# EAGLE board 13506-Spectacle_Audio_Output_Board-panel.10 (EAGLE 7.5.0), part 1 of 7
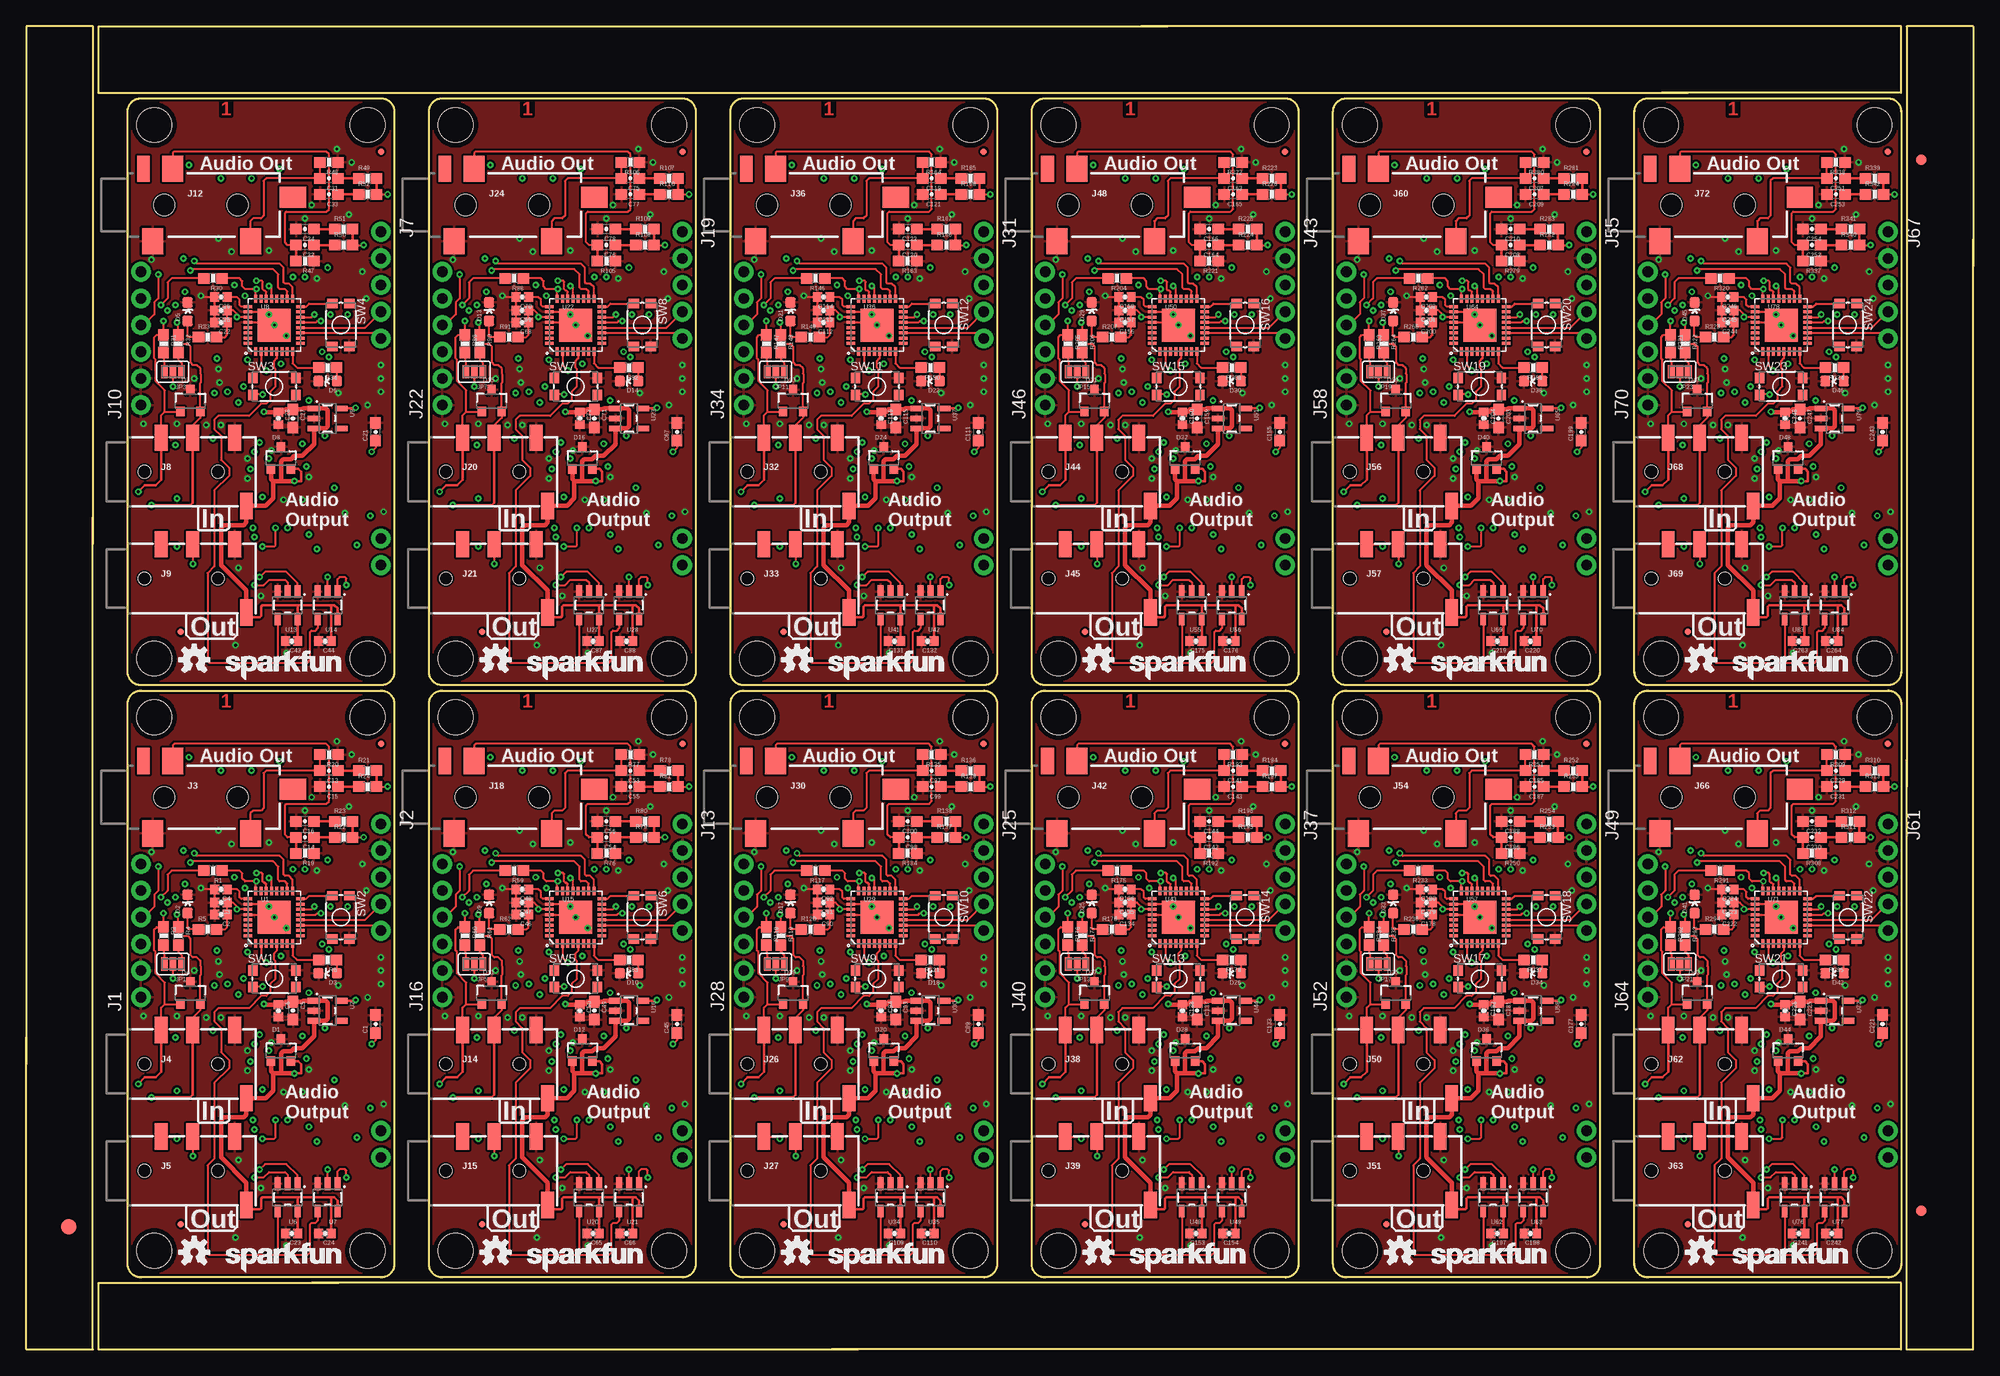
[diagram p0: board, top side]
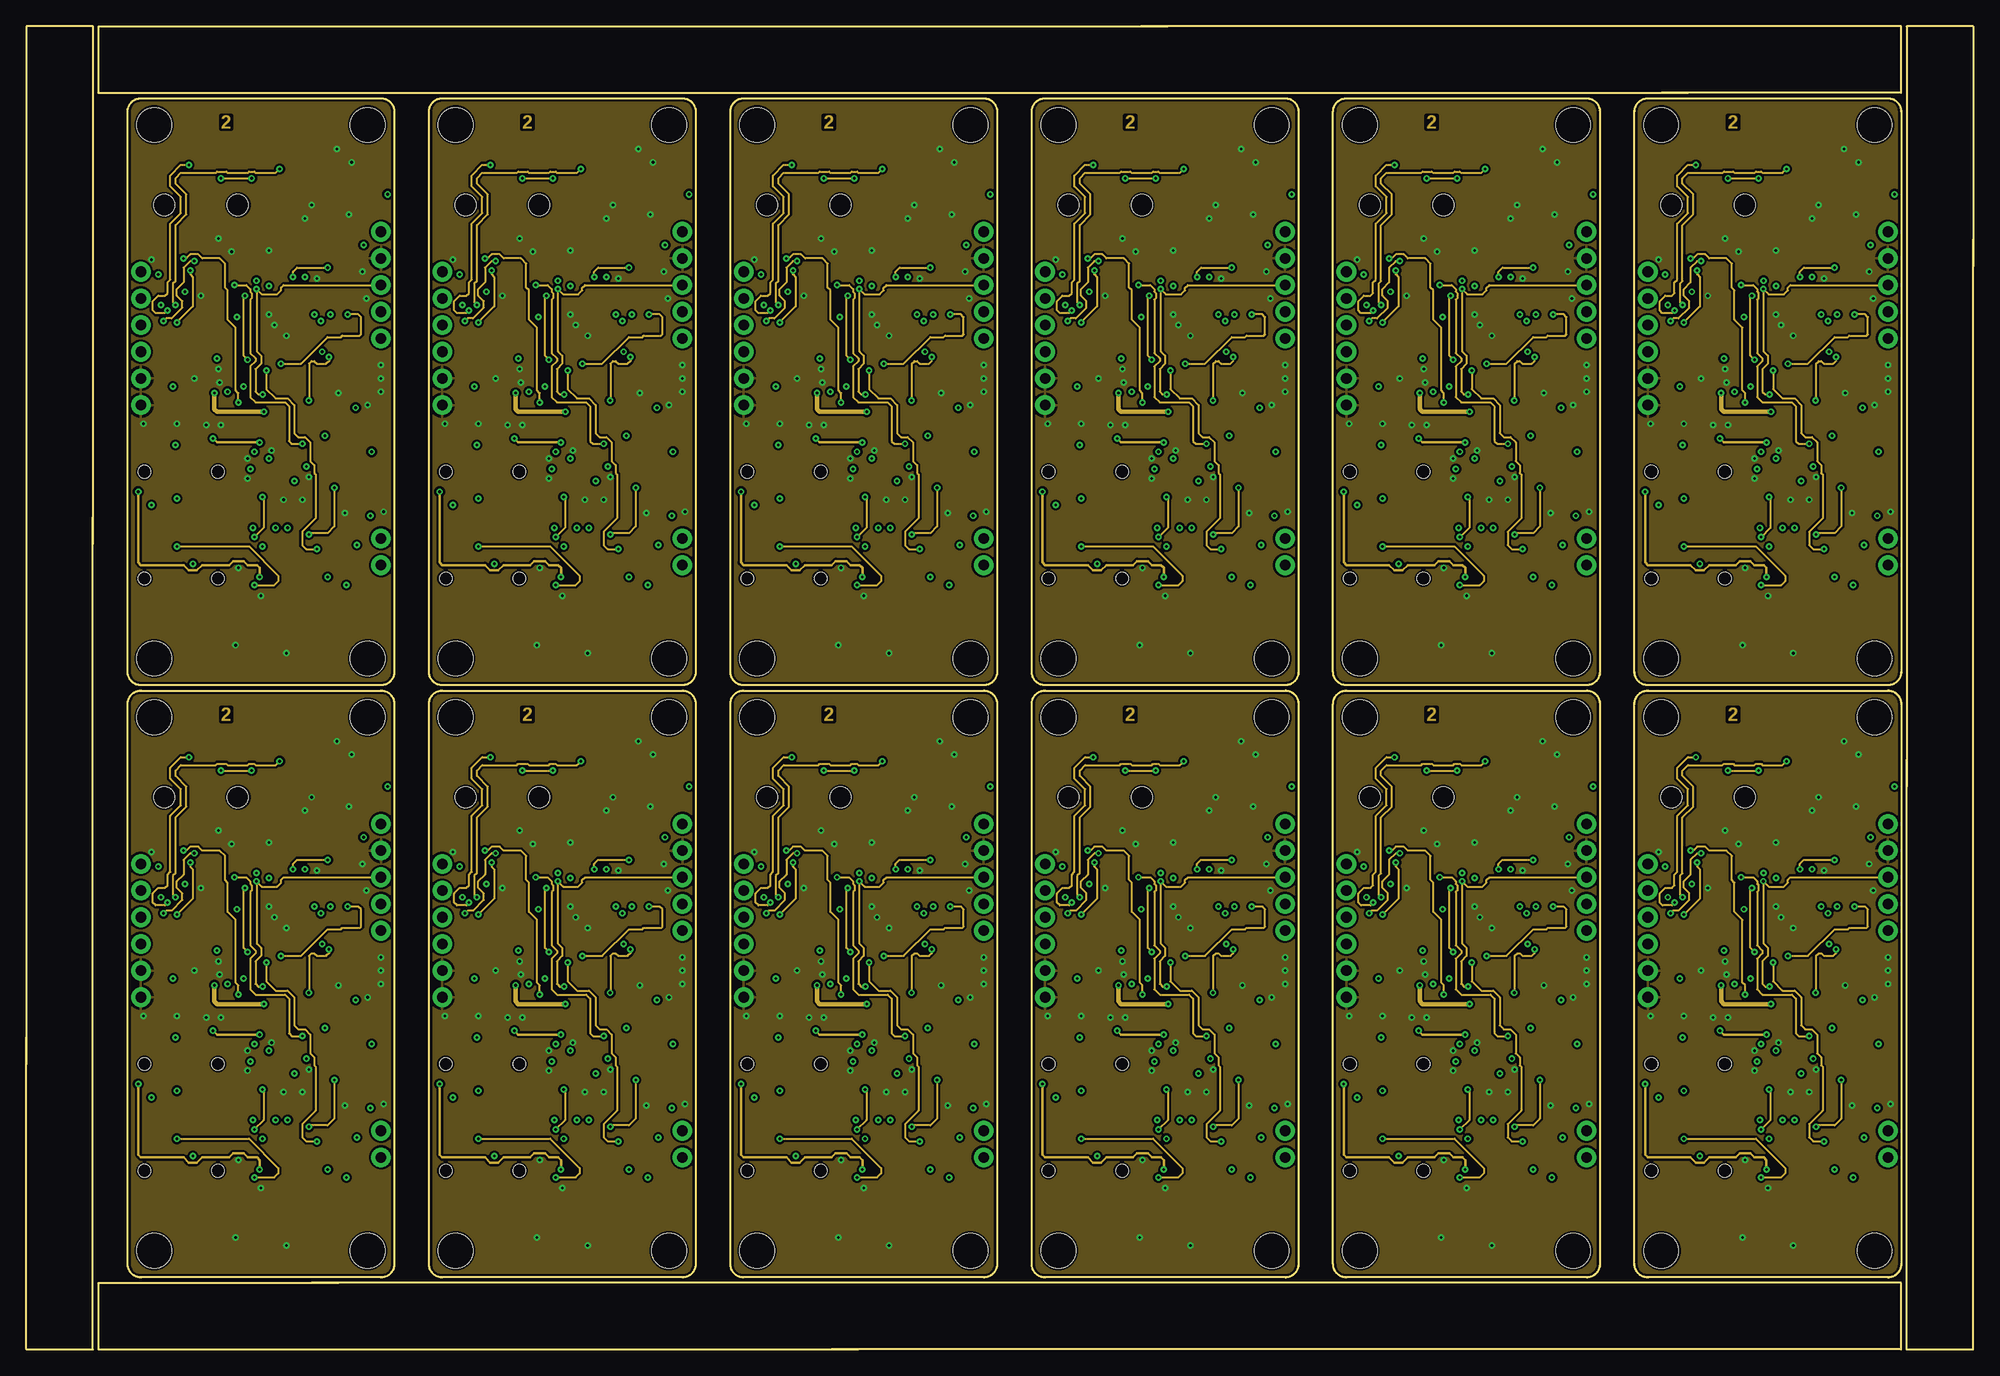
[diagram p1: board, inner layer Route2]
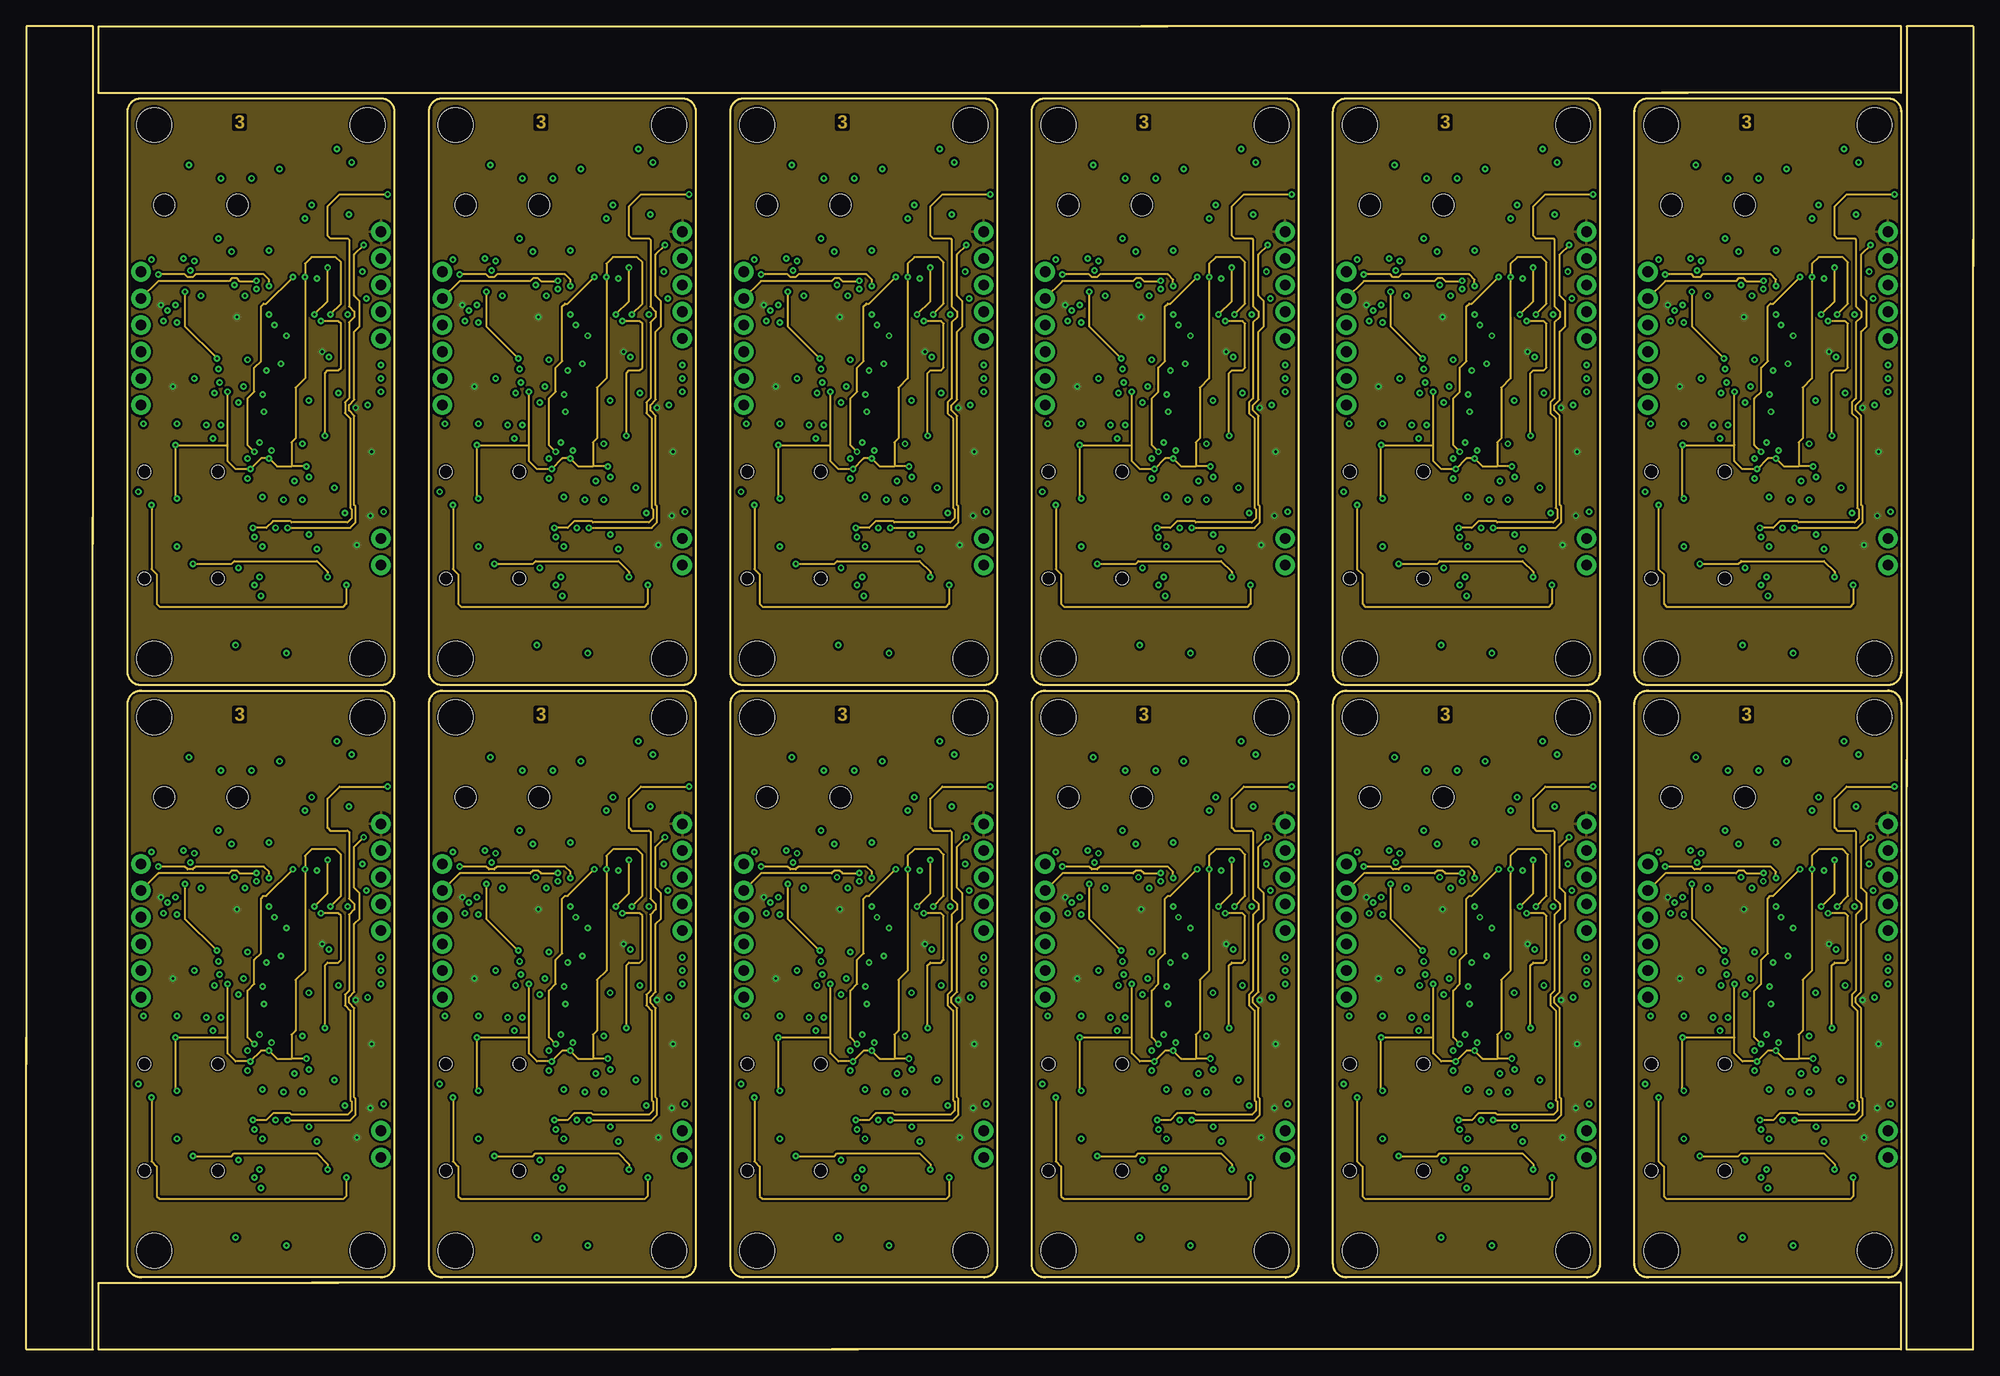
[diagram p2: board, inner layer Route15]
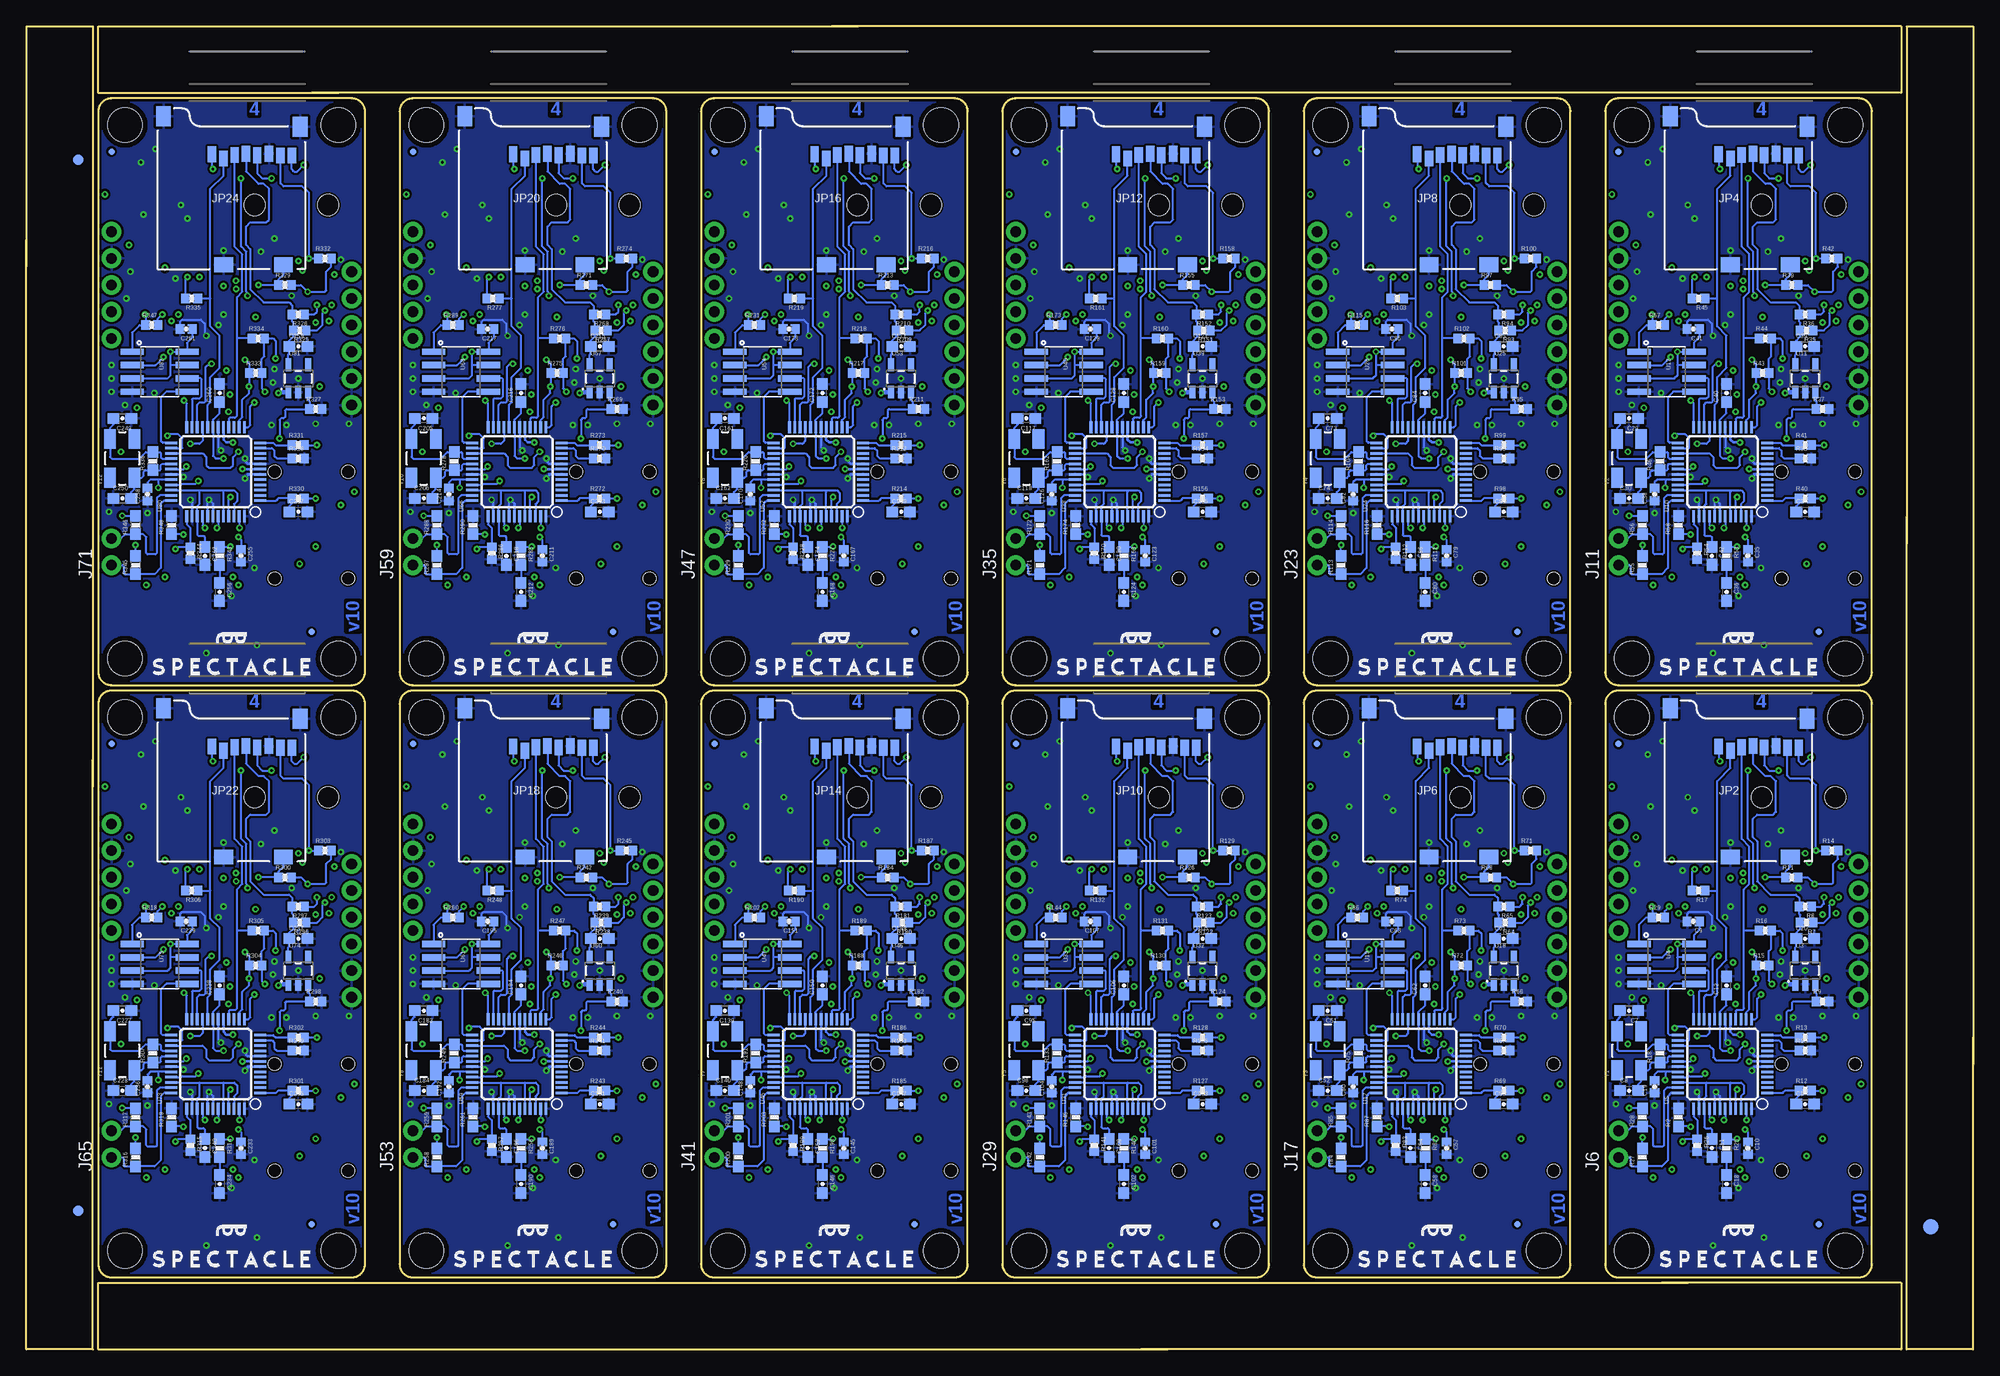
[diagram p3: board, bottom side, seen from below]

Size 185.42 x 125.98 mm. Coordinates in mm from the lower left corner, seen from the top.
Outline: 6.35,79.25 6.35,0 0,0 0,29.72
Outline: 0,27.18 0,125.98 6.35,125.98 6.35,76.71
Outline: 79.25,0 6.86,0 6.86,6.35 29.72,6.35
Outline: 27.18,6.35 178.56,6.35 178.56,0 76.71,0
Outline: 106.17,125.98 178.56,125.98 178.56,119.63 155.7,119.63
Outline: 158.24,119.63 6.86,119.63 6.86,125.98 108.71,125.98
Outline: 179.07,53.59 179.07,125.98 185.42,125.98 185.42,103.12
Outline: 185.42,105.66 185.42,0 179.07,0 179.07,56.13
Outline: 33.78,6.86 10.92,6.86 arc-90 9.65,8.13 9.65,61.47 arc-90 10.92,62.74 33.78,62.74 arc-90 35.05,61.47 35.05,8.13 arc-90 33.78,6.86
Outline: 33.78,63.25 10.92,63.25 arc-90 9.65,64.52 9.65,117.86 arc-90 10.92,119.13 33.78,119.13 arc-90 35.05,117.86 35.05,64.52 arc-90 33.78,63.25
Outline: 62.48,6.86 39.62,6.86 arc-90 38.35,8.13 38.35,61.47 arc-90 39.62,62.74 62.48,62.74 arc-90 63.75,61.47 63.75,8.13 arc-90 62.48,6.86
Outline: 62.48,63.25 39.62,63.25 arc-90 38.35,64.52 38.35,117.86 arc-90 39.62,119.13 62.48,119.13 arc-90 63.75,117.86 63.75,64.52 arc-90 62.48,63.25
Outline: 91.19,6.86 68.33,6.86 arc-90 67.06,8.13 67.06,61.47 arc-90 68.33,62.74 91.19,62.74 arc-90 92.46,61.47 92.46,8.13 arc-90 91.19,6.86
Outline: 91.19,63.25 68.33,63.25 arc-90 67.06,64.52 67.06,117.86 arc-90 68.33,119.13 91.19,119.13 arc-90 92.46,117.86 92.46,64.52 arc-90 91.19,63.25
Outline: 119.89,6.86 97.03,6.86 arc-90 95.76,8.13 95.76,61.47 arc-90 97.03,62.74 119.89,62.74 arc-90 121.16,61.47 121.16,8.13 arc-90 119.89,6.86
Outline: 119.89,63.25 97.03,63.25 arc-90 95.76,64.52 95.76,117.86 arc-90 97.03,119.13 119.89,119.13 arc-90 121.16,117.86 121.16,64.52 arc-90 119.89,63.25
Outline: 148.59,6.86 125.73,6.86 arc-90 124.46,8.13 124.46,61.47 arc-90 125.73,62.74 148.59,62.74 arc-90 149.86,61.47 149.86,8.13 arc-90 148.59,6.86
Outline: 148.59,63.25 125.73,63.25 arc-90 124.46,64.52 124.46,117.86 arc-90 125.73,119.13 148.59,119.13 arc-90 149.86,117.86 149.86,64.52 arc-90 148.59,63.25
Outline: 177.29,6.86 154.43,6.86 arc-90 153.16,8.13 153.16,61.47 arc-90 154.43,62.74 177.29,62.74 arc-90 178.56,61.47 178.56,8.13 arc-90 177.29,6.86
Outline: 177.29,63.25 154.43,63.25 arc-90 153.16,64.52 153.16,117.86 arc-90 154.43,119.13 177.29,119.13 arc-90 178.56,117.86 178.56,64.52 arc-90 177.29,63.25
Copper layers (1*2*15*16): Top 0.035559375mm / dielectric 0.47751875mm / Route2 0.035559375mm / dielectric 0.47751875mm / Route15 0.035559375mm / dielectric 0.47751875mm / Bottom 0.035559375mm
Design rules "SparkFun-4-layer-TIGHT *": minimum track width 7mil, minimum drill 10mil, track to track 7mil, track to pad 7mil, pad to pad 7mil, via to via 7mil, smd to smd 7mil, copper to edge 7mil, drill to drill 7mil, minimum pad ring 7mil, minimum via ring 7mil, stop-mask expansion 4mil, vias tented up to drill 25mil, thermal gap 10mil
tRestrict: area 25.1,40.9 to 25.3,41.4; area 23.2,42.7 to 24,43.1; area 22,40.8 to 22.2,41.4; area 23.4,39.5 to 23.9,39.8; area 25.1,97.3 to 25.3,97.8; area 23.2,99.1 to 24,99.4; area 22,97.2 to 22.2,97.8; area 23.4,95.9 to 23.9,96.1; area 53.8,40.9 to 54,41.4; area 51.9,42.7 to 52.7,43.1; area 50.7,40.8 to 50.9,41.4; area 52.1,39.5 to 52.6,39.8; area 53.8,97.3 to 54,97.8; area 51.9,99.1 to 52.7,99.4; area 50.7,97.2 to 50.9,97.8; area 52.1,95.9 to 52.6,96.1; area 82.5,40.9 to 82.7,41.4; area 80.6,42.7 to 81.4,43.1; area 79.4,40.8 to 79.6,41.4; area 80.8,39.5 to 81.3,39.8; area 82.5,97.3 to 82.7,97.8; area 80.6,99.1 to 81.4,99.4; area 79.4,97.2 to 79.6,97.8; area 80.8,95.9 to 81.3,96.1; area 111.3,40.9 to 111.4,41.4; area 109.3,42.7 to 110.1,43.1; area 108.1,40.8 to 108.3,41.4; area 109.5,39.5 to 110,39.8; area 111.3,97.3 to 111.4,97.8; area 109.3,99.1 to 110.1,99.4; area 108.1,97.2 to 108.3,97.8; area 109.5,95.9 to 110,96.1; area 140,40.9 to 140.1,41.4; area 138,42.7 to 138.8,43.1; area 136.8,40.8 to 137,41.4; area 138.2,39.5 to 138.7,39.8; area 140,97.3 to 140.1,97.8; area 138,99.1 to 138.8,99.4; area 136.8,97.2 to 137,97.8; area 138.2,95.9 to 138.7,96.1; area 168.7,40.9 to 168.8,41.4; area 166.8,42.7 to 167.5,43.1; area 165.5,40.8 to 165.7,41.4; area 166.9,39.5 to 167.4,39.8; area 168.7,97.3 to 168.8,97.8; area 166.8,99.1 to 167.5,99.4; area 165.5,97.2 to 165.7,97.8; area 166.9,95.9 to 167.4,96.1
bRestrict: area 24.3,22.7 to 24.5,23.1; area 24.3,79.1 to 24.5,79.5; area 53,22.7 to 53.2,23.1; area 53,79.1 to 53.2,79.5; area 81.7,22.7 to 81.9,23.1; area 81.7,79.1 to 81.9,79.5; area 110.4,22.7 to 110.6,23.1; area 110.4,79.1 to 110.6,79.5; area 139.1,22.7 to 139.3,23.1; area 139.1,79.1 to 139.3,79.5; area 167.8,22.7 to 168,23.1; area 167.8,79.1 to 168,79.5

## Footprints (pad centres in the part's own frame; a part is rotated, then mirrored left to right if it is on the bottom)
0603-CAP = smd 1.1 x 1: 1 -0.85,0; 2 0.85,0
0402-CAP = smd 0.85 x 0.9: 1 -0.58,0; 2 0.58,0
SOT23-3 = smd 0.8 x 0.9: 1 -0.95,-1; 2 0.95,-1; 3 0,1.1
LED-0603 = smd 1 x 1: A 0,-0.877; C 0,0.877
FIDUCIAL-1.5X3 = smd 1.5 x 1.5: 1 0,0
FIDUCIAL-1X2 = smd 1 x 1: 1 0,0
MICRO-FIDUCIAL = smd 0.635 x 0.635: 1 0,0
STAND-OFF = hole 3.302: 0,0
1X06_NO_SILK = drill 1.016 pad 1.88: 1 0,0; 2 2.54,0; 3 5.08,0; 4 7.62,0; 5 10.16,0; 6 12.7,0
1X05_NO_SILK = drill 1.016 pad 1.88: 1 0,0; 2 2.54,0; 3 5.08,0; 4 7.62,0; 5 10.16,0
AUDIO-JACK-3.5MM-SMD = smd 2 x 2.5: RING 4.3,3.45; SLEEVE 2.4,-3.45; TIP 11.7,-3.45 | smd 1.2 x 2.5: RSH 1.5,3.45 | smd 2.5 x 2: TSH 15.75,0.75 | hole 2: 3.5,0; 10.5,0
AUDIO_JACK_3.5MM_TRRS_SMD_RA = smd 1.2 x 2.5: EARTH 11.3,-3.25; RING1 6.2,3.25; RING2 3.2,3.25; TIP 10.2,3.25 | hole 1.2: 1.6,0; 8.6,0
1X02_NO_SILK = drill 1.016 pad 1.88: 1 0,0; 2 2.54,0
PAD-JUMPER-3-NC_BY_PASTE_YES_SILK_FULL_BOX = smd 0.635 x 1.27: 1 -0.813,0; 2 0,0; 3 0.813,0
MICROSD_1:1 = smd 0.8 x 1.5: 1 5.096,10.919; 2 6.218,10.519; 3 7.274,10.853; 4 8.367,10.982; 5 9.421,10.828; 6 10.539,10.973; 7 11.648,10.819; 8 12.721,10.819 | smd 1.8 x 1.4: CD1 11.92,0.4; CD2 6.22,0.4 | smd 1.4 x 1.9: GND1 0.497,14.55; GND3 13.52,13.55
0603-RES = smd 1.1 x 1: 1 -0.85,0; 2 0.85,0
0402-RES = smd 0.85 x 0.9: 1 -0.58,0; 2 0.58,0
TACTILE_SWITCH_SMD_4.6X2.8MM = smd 0.9 x 1: 1 -2.05,-0.8; 2 2.05,-0.8; 3 2.05,0.8; 4 -2.05,0.8
QFN-32 = smd 0.285 x 0.8: 1 -1.75,-2.5; 2 -1.25,-2.5; 3 -0.75,-2.5; 4 -0.25,-2.5; 5 0.25,-2.5; 6 0.75,-2.5; 7 1.25,-2.5; 8 1.75,-2.5; 17 1.75,2.5; 18 1.25,2.5; 19 0.75,2.5; 20 0.25,2.5; 21 -0.25,2.5; 22 -0.75,2.5; 23 -1.25,2.5; 24 -1.75,2.5 | smd 0.8 x 0.285: 9 2.5,-1.75; 10 2.5,-1.25; 11 2.5,-0.75; 12 2.5,-0.25; 13 2.5,0.25; 14 2.5,0.75; 15 2.5,1.25; 16 2.5,1.75; 25 -2.5,1.75; 26 -2.5,1.25; 27 -2.5,0.75; 28 -2.5,0.25; 29 -2.5,-0.25; 30 -2.5,-0.75; 31 -2.5,-1.25; 32 -2.5,-1.75 | smd 3.15 x 3.15: EP 0,0
SOT23-5 = smd 0.55 x 1.2: 1 -0.95,-1.3; 2 0,-1.3; 3 0.95,-1.3; 4 0.95,1.3; 5 -0.95,1.3
SO08 = smd 0.61 x 2.21: 1 -1.905,-2.616; 2 -0.635,-2.616; 3 0.635,-2.616; 4 1.905,-2.616; 5 1.905,2.616; 6 0.635,2.616; 7 -0.635,2.616; 8 -1.905,2.616
LQFP-48 = smd 0.254 x 1.143: 1 -2.75,-4.25; 2 -2.25,-4.25; 3 -1.75,-4.25; 4 -1.25,-4.25; 5 -0.75,-4.25; 6 -0.25,-4.25; 7 0.25,-4.25; 8 0.75,-4.25; 9 1.25,-4.25; 10 1.75,-4.25; 11 2.25,-4.25; 12 2.75,-4.25; 25 2.75,4.25; 26 2.25,4.25; 27 1.75,4.25; 28 1.25,4.25; 29 0.75,4.25; 30 0.25,4.25; 31 -0.25,4.25; 32 -0.75,4.25; 33 -1.25,4.25; 34 -1.75,4.25; 35 -2.25,4.25; 36 -2.75,4.25 | smd 1.143 x 0.254: 13 4.25,-2.75; 14 4.25,-2.25; 15 4.25,-1.75; 16 4.25,-1.25; 17 4.25,-0.75; 18 4.25,-0.25; 19 4.25,0.25; 20 4.25,0.75; 21 4.25,1.25; 22 4.25,1.75; 23 4.25,2.25; 24 4.25,2.75; 37 -4.25,2.75; 38 -4.25,2.25; 39 -4.25,1.75; 40 -4.25,1.25; 41 -4.25,0.75; 42 -4.25,0.25; 43 -4.25,-0.25; 44 -4.25,-0.75; 45 -4.25,-1.25; 46 -4.25,-1.75; 47 -4.25,-2.25; 48 -4.25,-2.75
CRYSTAL-SMD-5X3 = smd 1.9 x 1.1: 1 -1.85,-1.15; 2 1.85,-1.15; 3 1.85,1.15; 4 -1.85,1.15